# Altium PCB PCB_ESP32_custom_board_design_2024-04-01.pcbdoc (part 2 of 2)
Units mil, origin at the board's own origin, x right, y up, seen from the top; angles counter-clockwise.
Board outline 3915.1 x 2179.21 mil, 2 copper layers (Top Layer, Bottom Layer); 47 components, 48 nets, 216 pads, 112 vias.
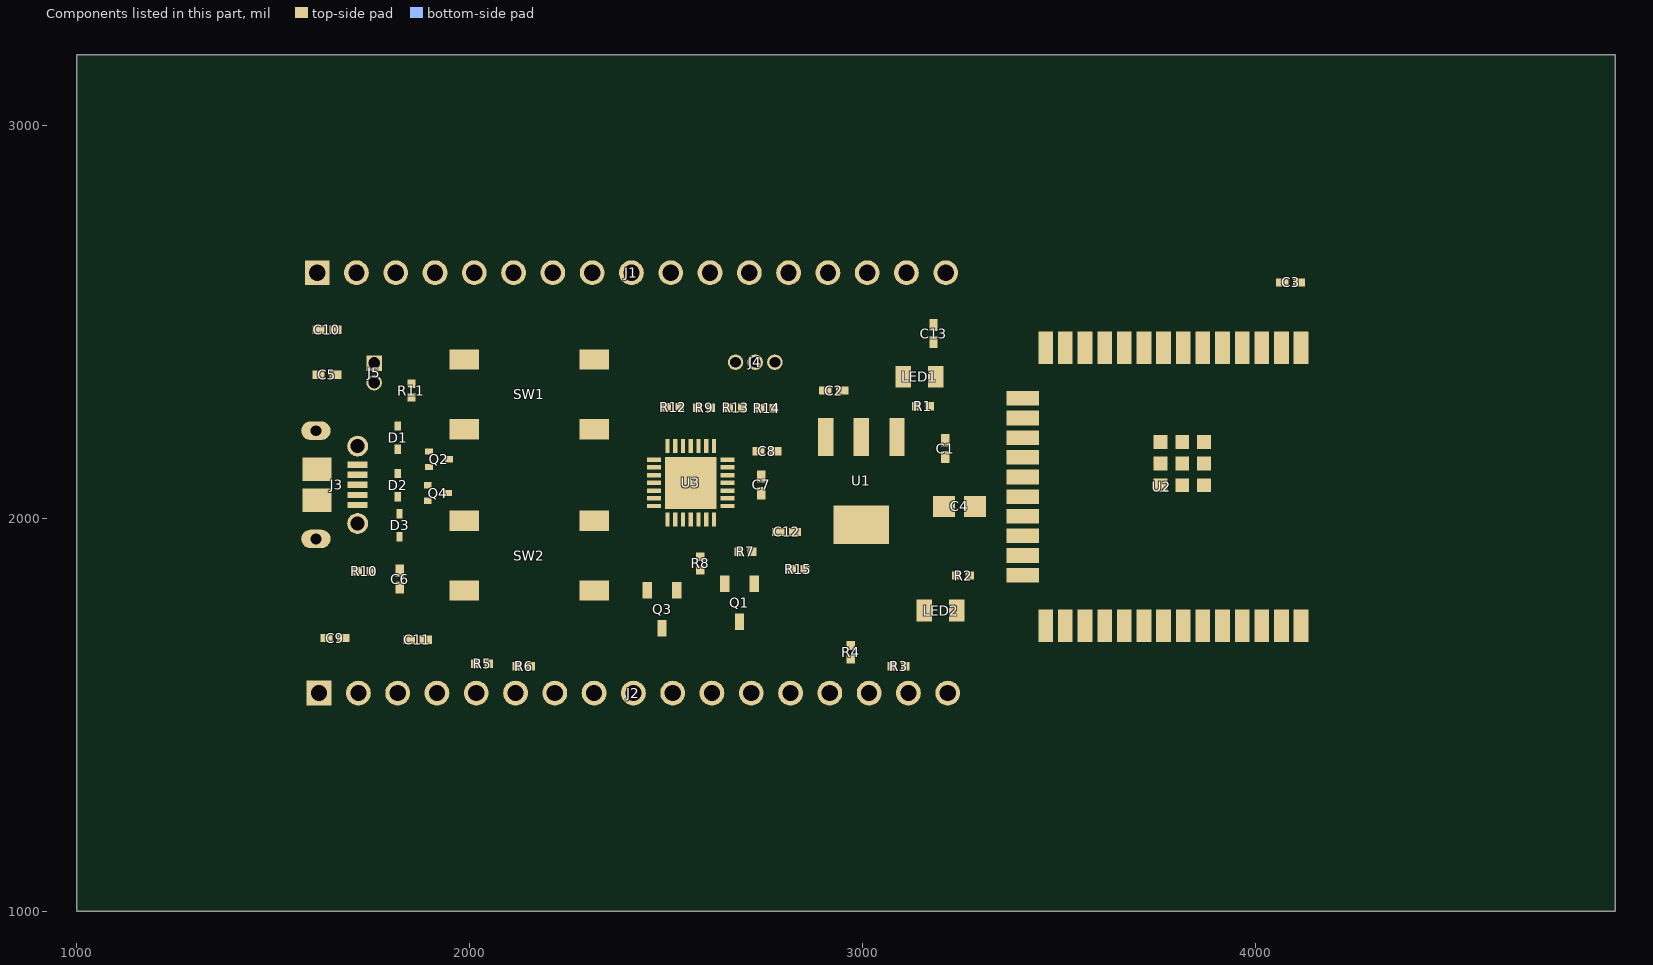
[diagram p2: the components of this part, seen from the top]

## Polygon pours and split planes (outlines as drawn) (continued)
+3V3 on Internal Plane 1 (split plane): 140 vertices, not listed, extent 2771.84,2585.41 2851.02,2664.59
+3V3 on Internal Plane 1 (split plane): 140 vertices, not listed, extent 2671.84,2585.41 2751.02,2664.59
+3V3 on Internal Plane 1 (split plane): 140 vertices, not listed, extent 2571.84,2585.41 2651.02,2664.59
+3V3 on Internal Plane 1 (split plane): 140 vertices, not listed, extent 2471.84,2585.41 2551.02,2664.59
+3V3 on Internal Plane 1 (split plane): 140 vertices, not listed, extent 2371.84,2585.41 2451.02,2664.59
+3V3 on Internal Plane 1 (split plane): 140 vertices, not listed, extent 2271.84,2585.41 2351.02,2664.59
+3V3 on Internal Plane 1 (split plane): 140 vertices, not listed, extent 2171.84,2585.41 2251.02,2664.59
+3V3 on Internal Plane 1 (split plane): 140 vertices, not listed, extent 2071.84,2585.41 2151.02,2664.59
+3V3 on Internal Plane 1 (split plane): 140 vertices, not listed, extent 1971.84,2585.41 2051.02,2664.59
+3V3 on Internal Plane 1 (split plane): 140 vertices, not listed, extent 1871.84,2585.41 1951.02,2664.59
+3V3 on Internal Plane 1 (split plane): 140 vertices, not listed, extent 1771.84,2585.41 1851.02,2664.59
+3V3 on Internal Plane 1 (split plane): 21 vertices, not listed, extent 1675.1,2588.68 1695.67,2609.25
+3V3 on Internal Plane 1 (split plane): 20 vertices, not listed, extent 1727.17,2588.68 1747.75,2609.25
+3V3 on Internal Plane 1 (split plane): 20 vertices, not listed, extent 1727.17,2640.75 1747.75,2661.32
+3V3 on Internal Plane 1 (split plane): 21 vertices, not listed, extent 1675.1,2640.75 1695.67,2661.32

## Other copper
Top Layer:
  text "Boot" at 2083.42,2454 h40
  text "EXT" at 2672.42,2433 h40
  text "PWR" at 2978.42,2406 h40
  text "RST" at 2112.42,2018 h40
  text "USER" at 3056.42,1798 h40